# Altium PCB MainControllerPCB.PcbDoc
Units mil, origin at the board's own origin, x right, y up, seen from the top; angles counter-clockwise.
Board outline 6000 x 6000 mil, 4 copper layers (Top Layer, Internal Plane 1, Internal Plane 2, Bottom Layer); 57 components, 84 nets, 327 pads, 42 vias.
Unrouted connection lines stored in the file: 1.
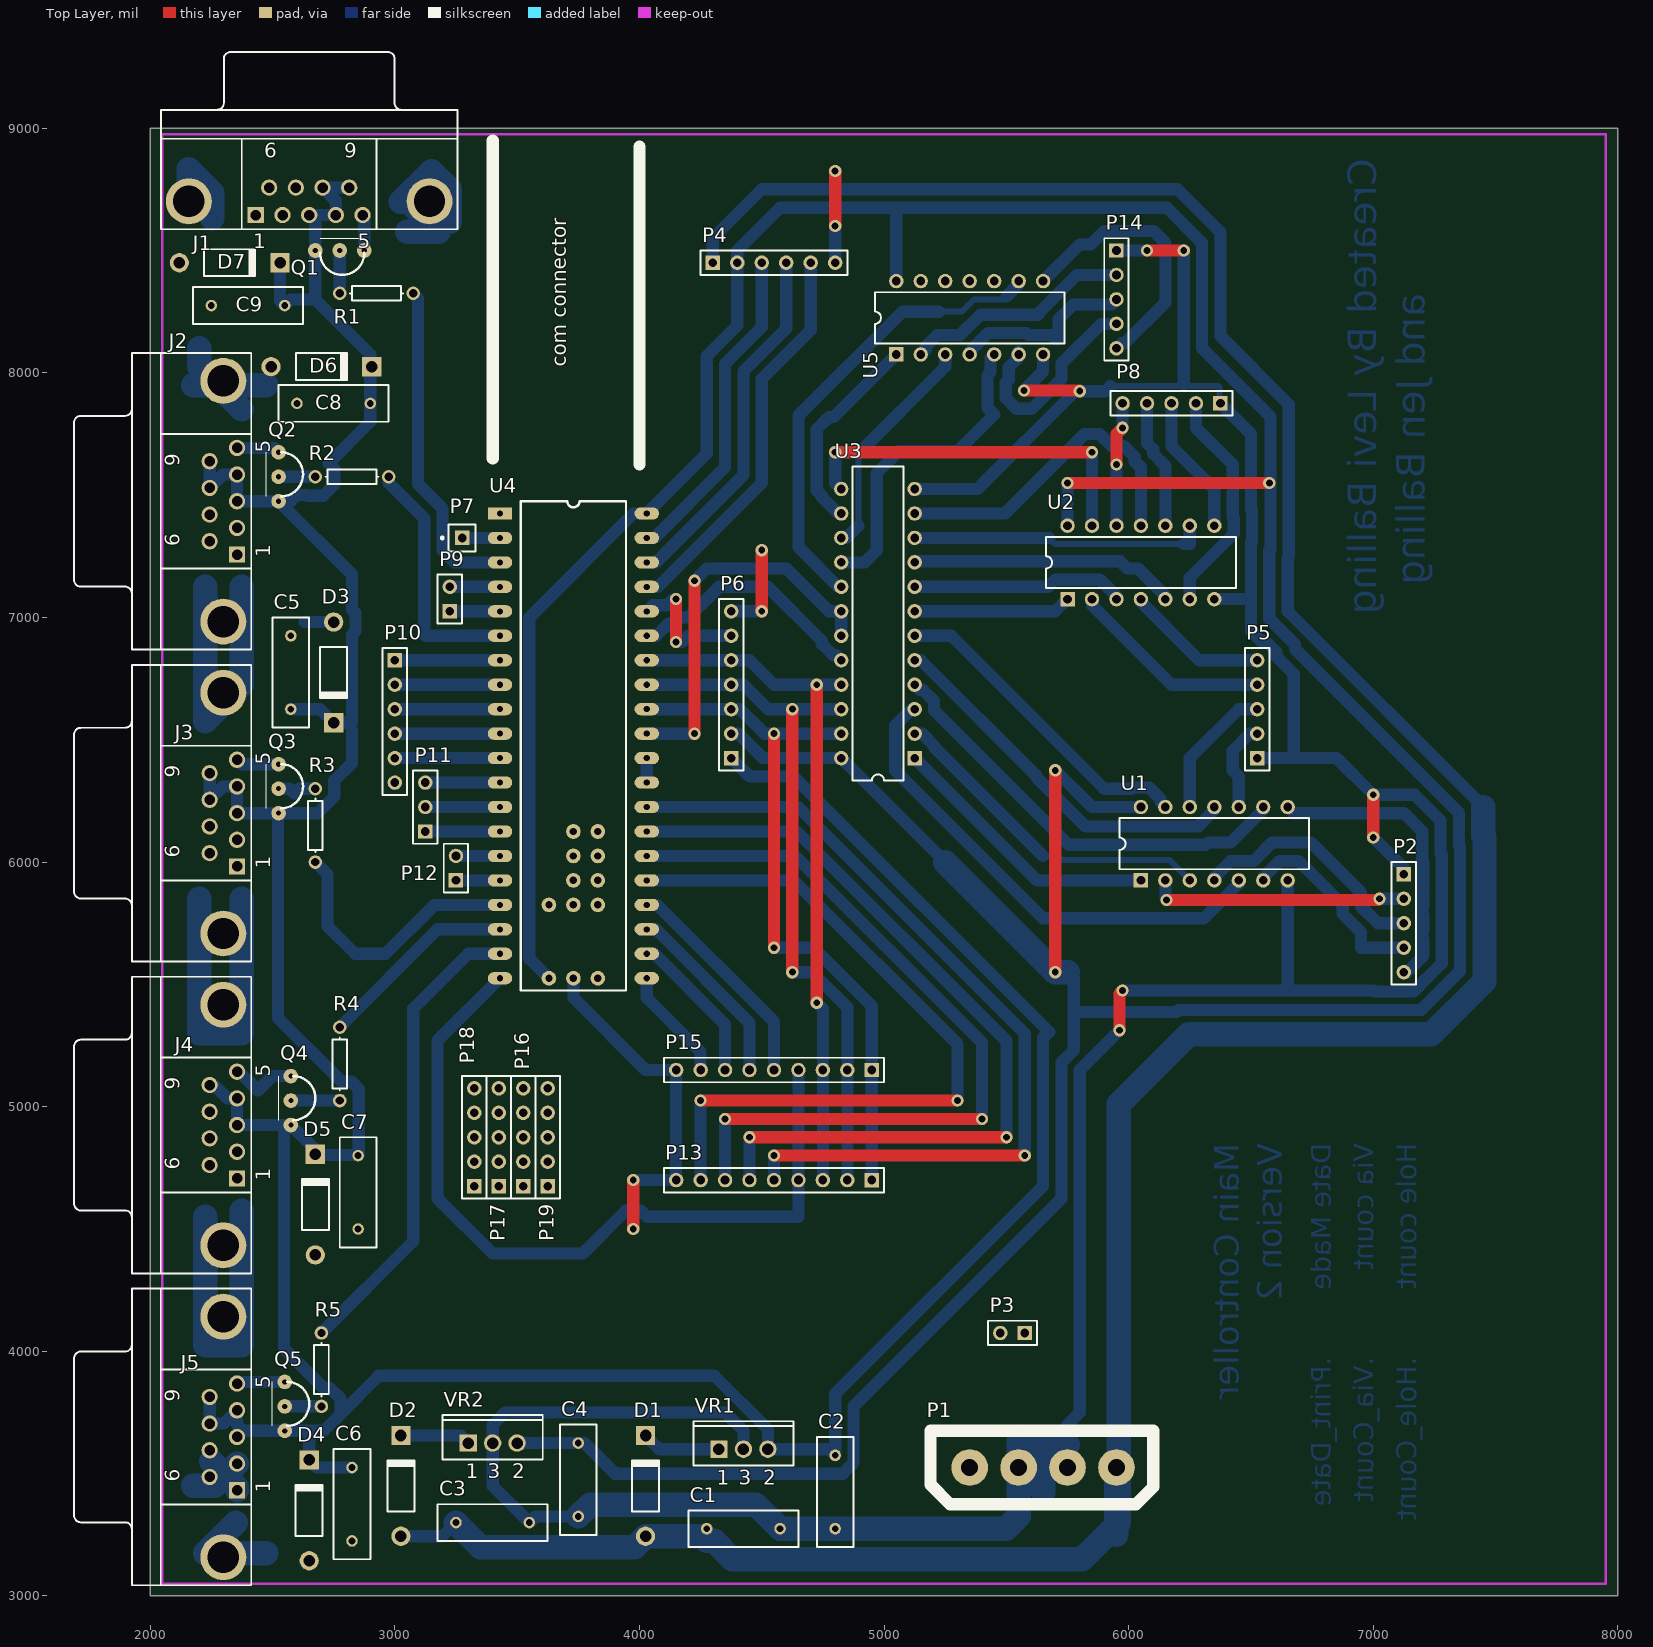
[diagram p0: Top Layer view]
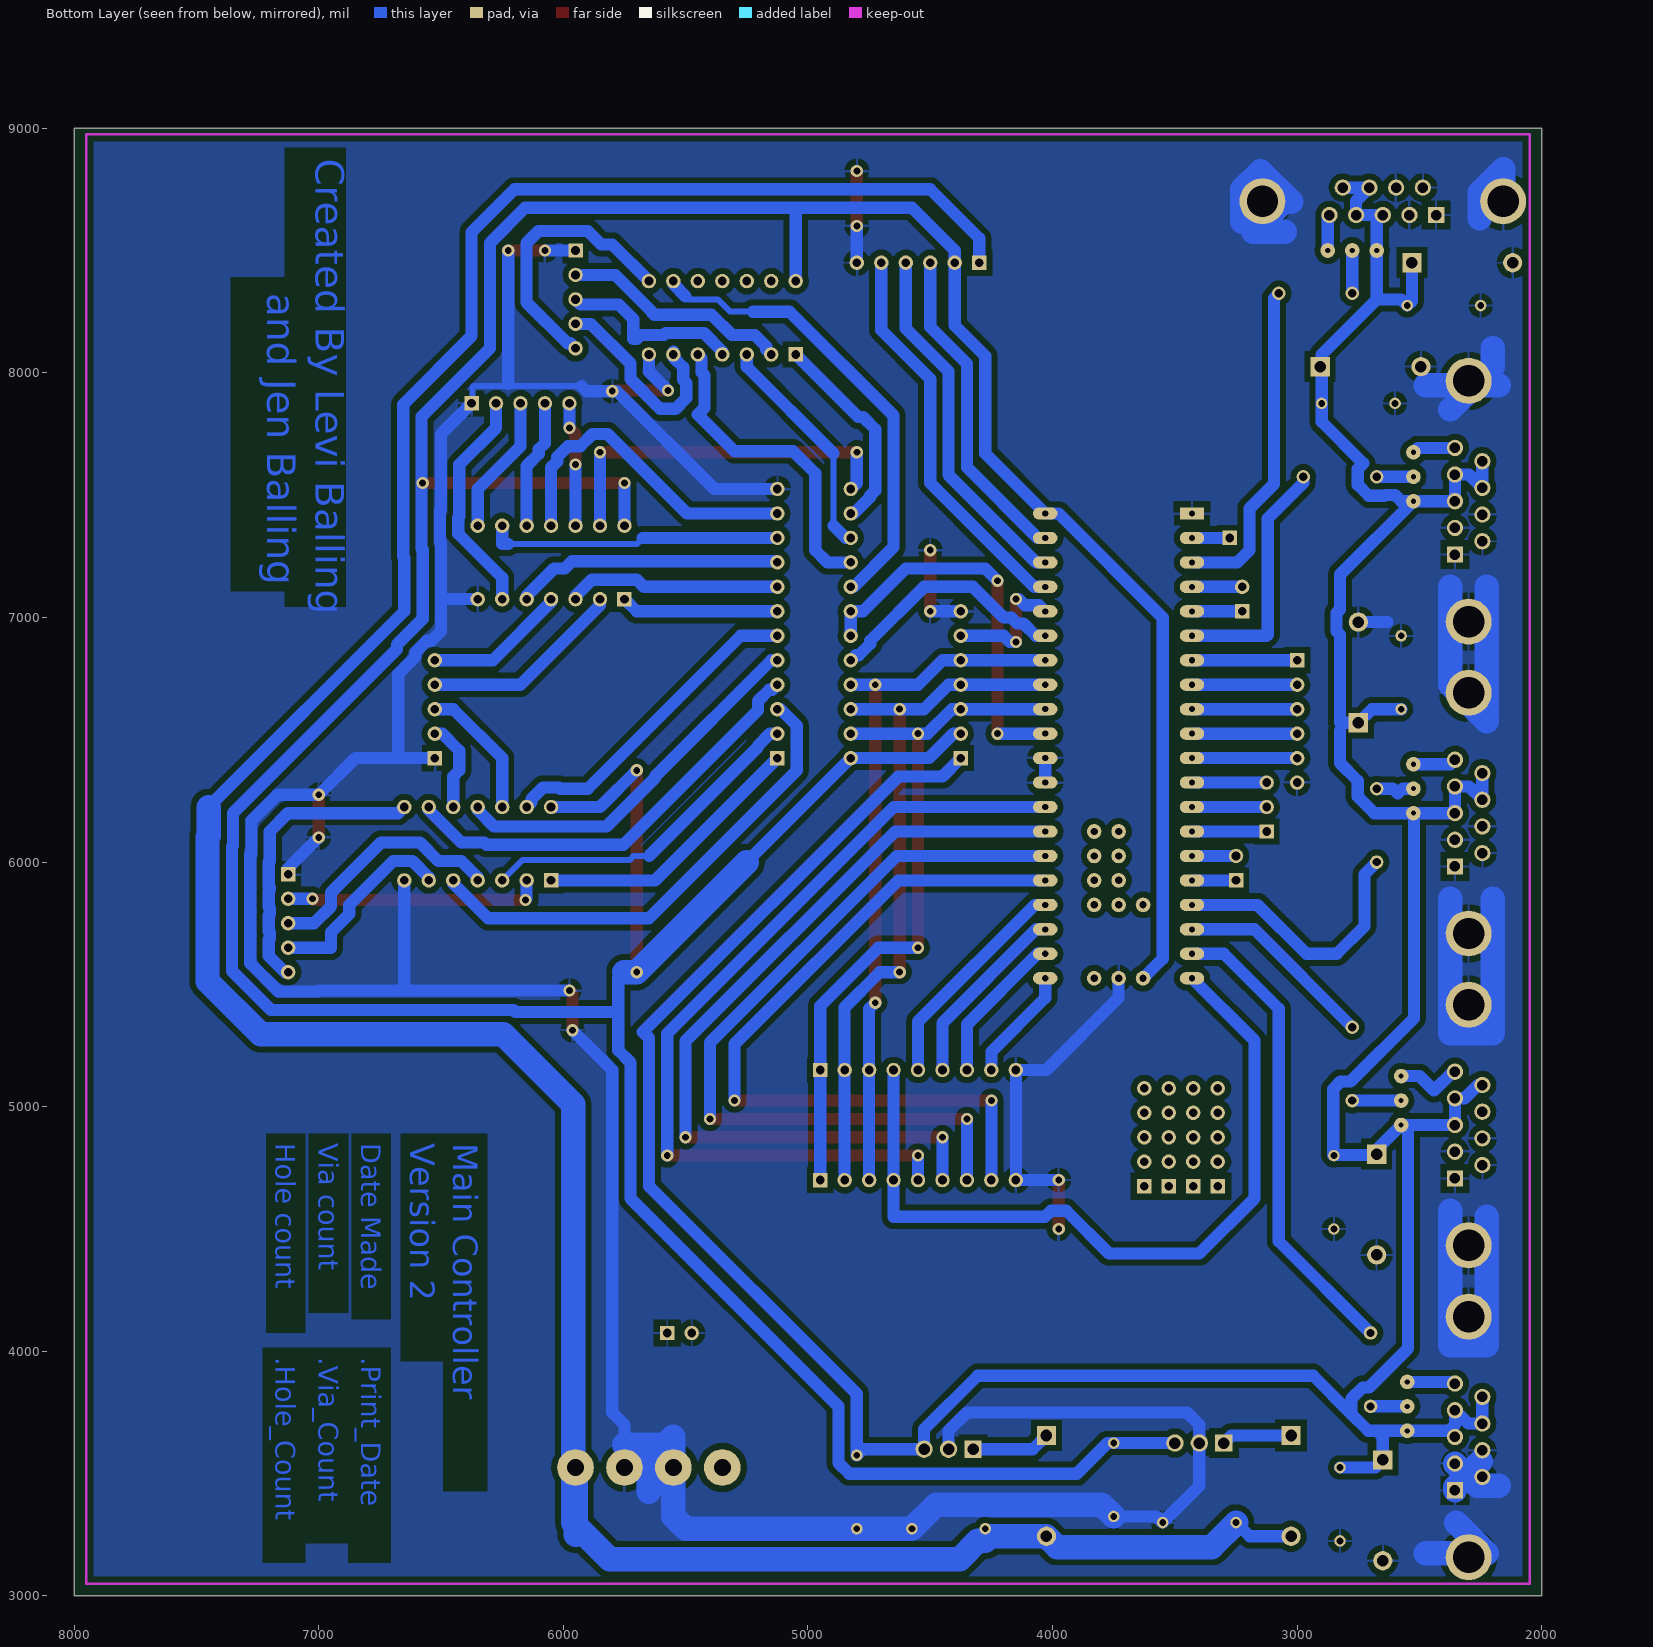
[diagram p1: Bottom Layer view, seen from below]
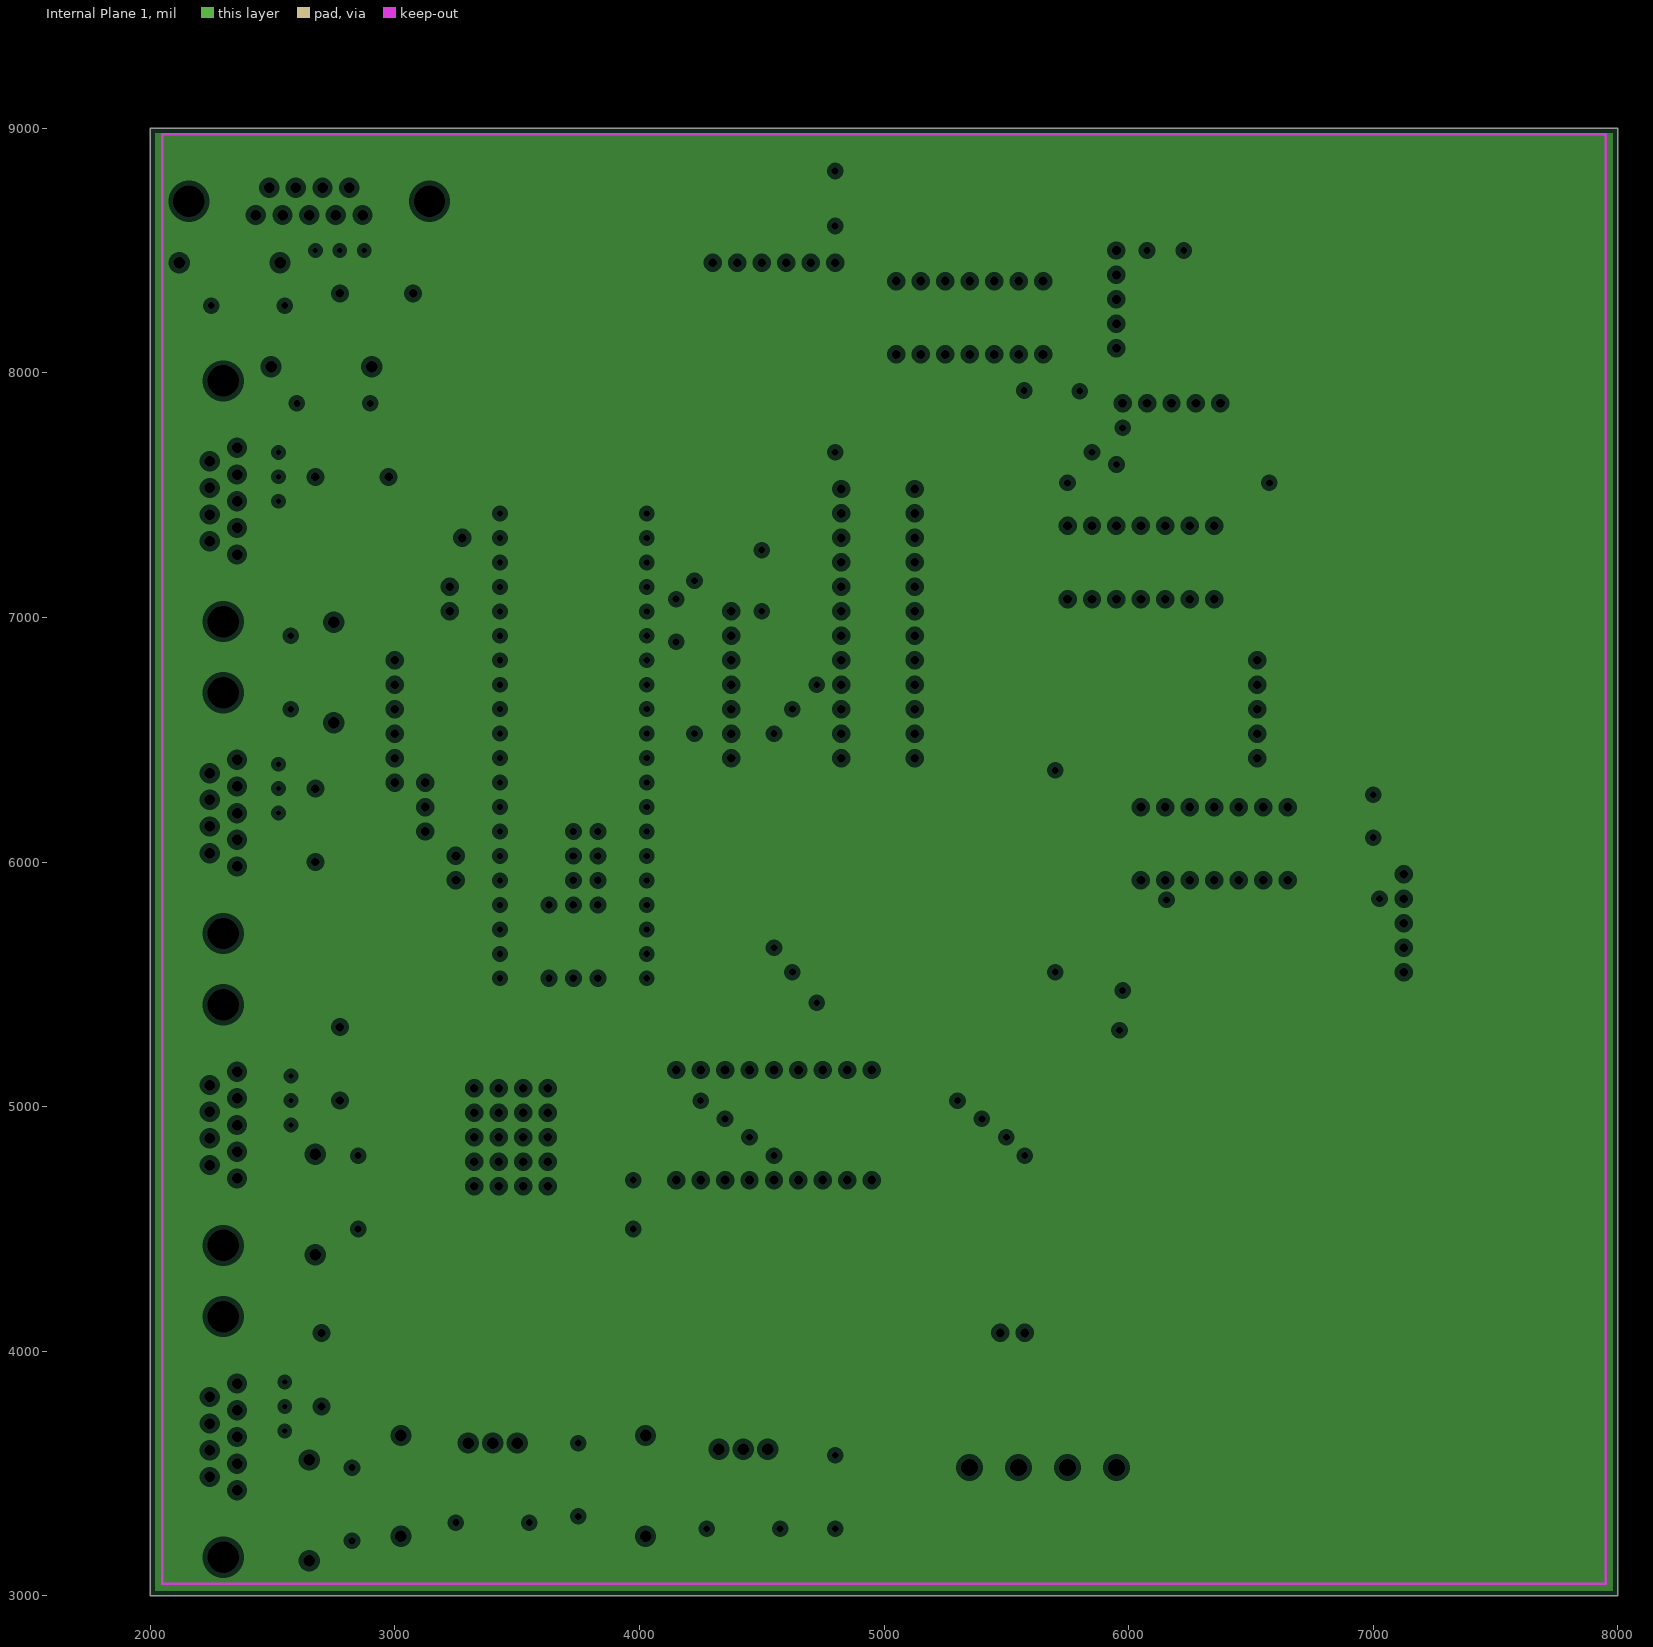
[diagram p2: Internal Plane 1, clearances drawn from the general rule]
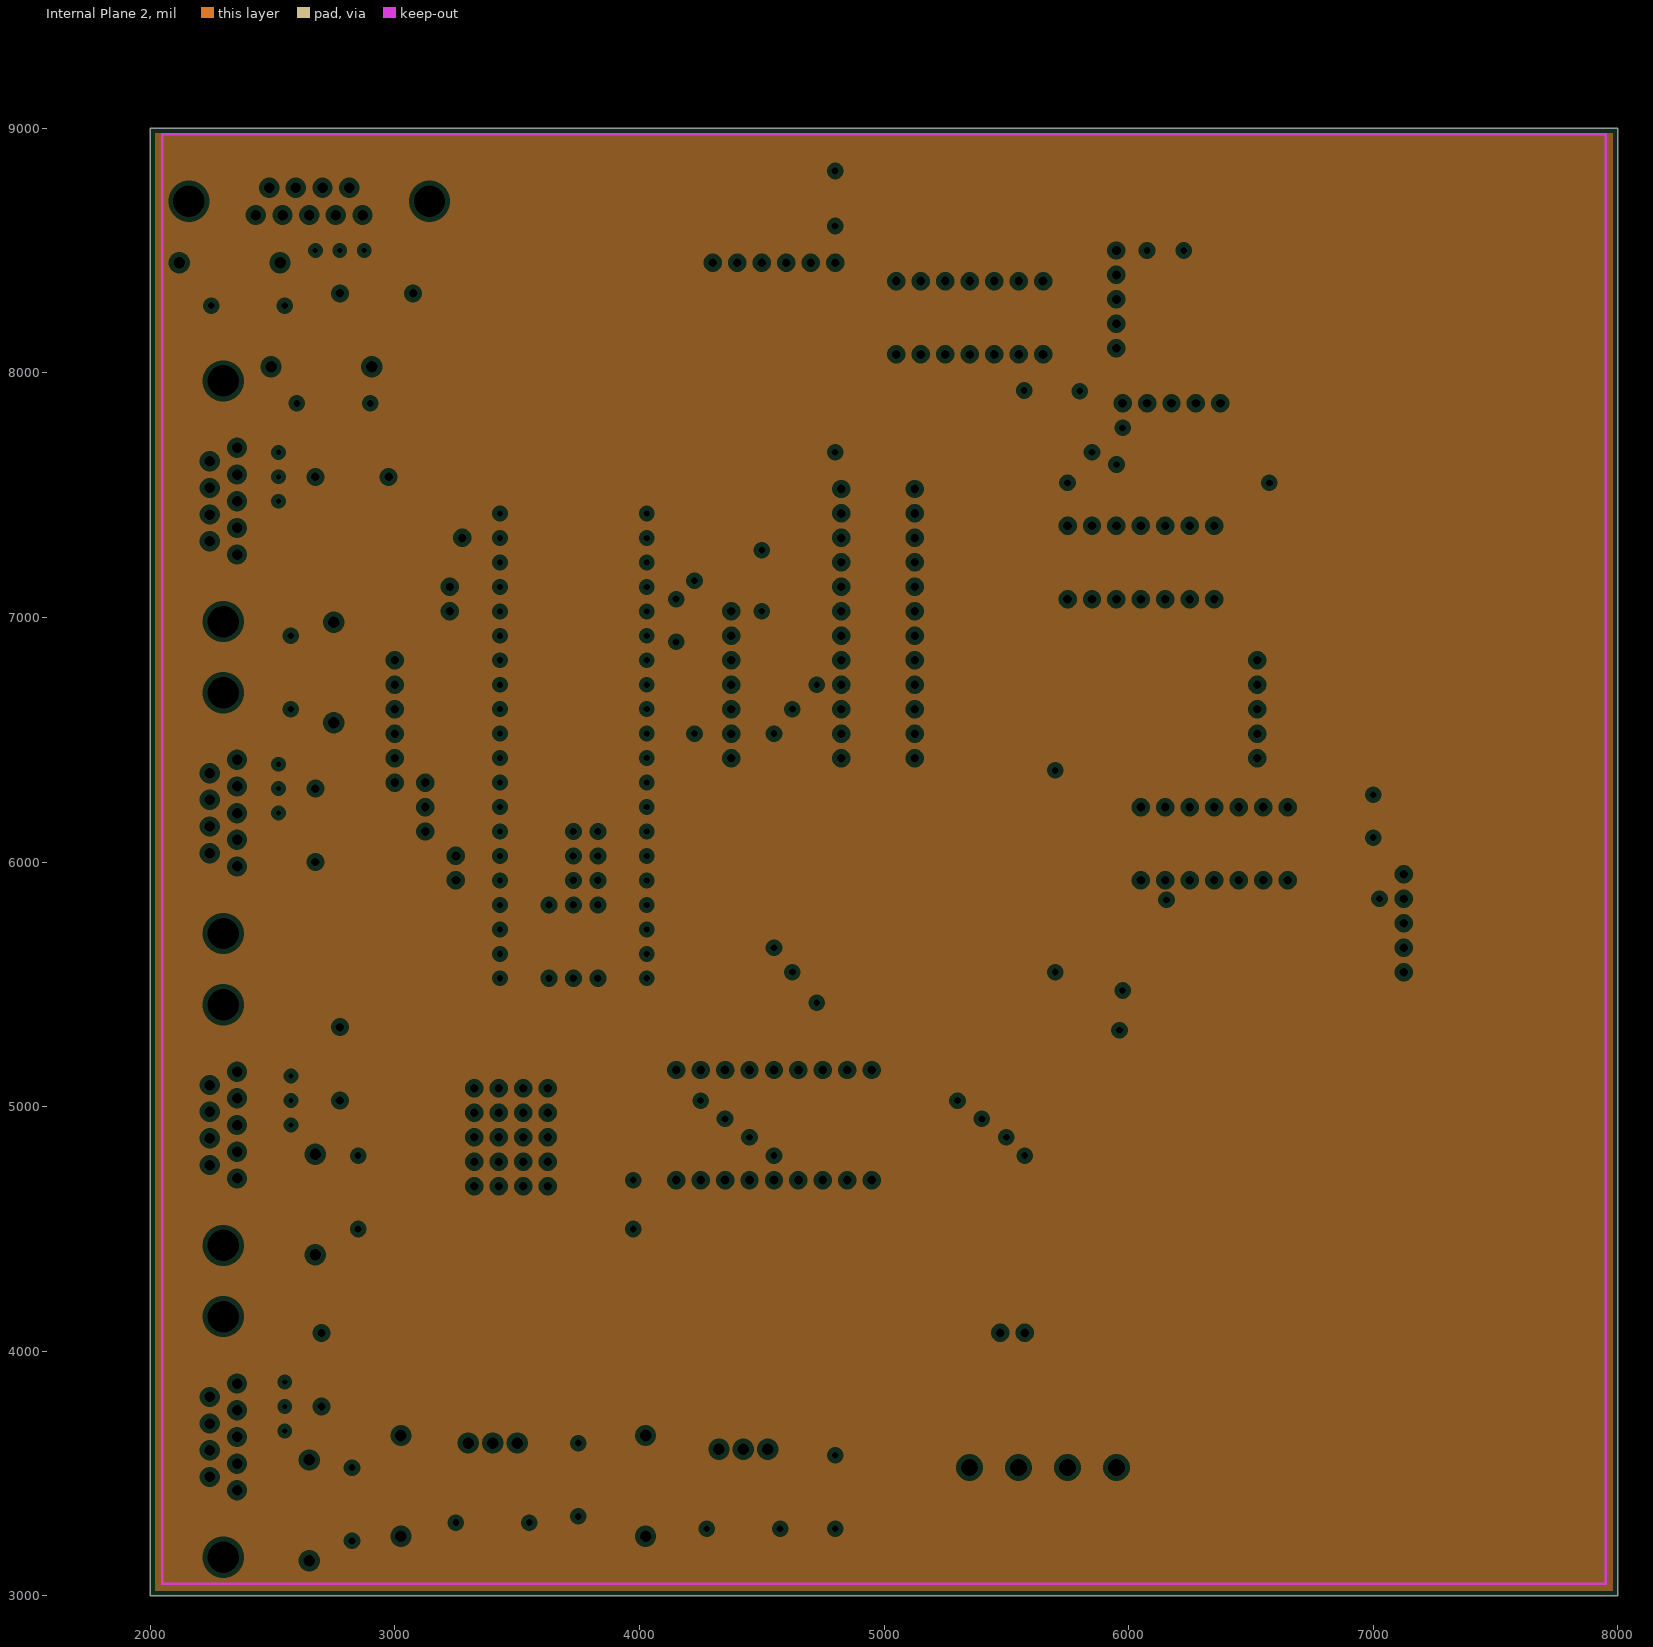
[diagram p3: Internal Plane 2, clearances drawn from the general rule]

## Layer stack, top to bottom
Top Layer: signal copper 1.4
Dielectric: dielectric 12.6, FR-4, Dk 4.8
Internal Plane 1: plane copper 1.4
Dielectric: dielectric 12.6, FR-4, Dk 4.8
Internal Plane 2: plane copper 1.4
Dielectric: dielectric 12.6, FR-4, Dk 4.8
Bottom Layer: signal copper 1.4

## Board outline
2000,3000 8000,3000 8000,9000 2000,9000

## Design rules (kind name [scope] priority, off if disabled: settings)
Clearance [All] p1: gap=25
PlaneClearance [All] p1: clearance=20
PlaneConnect [All] p1: planeconnectstyle=Relief reliefexpansion=20 reliefentries=4 reliefconductorwidth=10 reliefairgap=10
PolygonConnect [All] p1: connectstyle=Relief reliefconductorwidth=10 reliefentries=4 polygonreliefangle="90 Angle"
RoomDefinition MainController [InComponentClass('MainController')] p1: confinementstyle=ConfineIn formatcopy=TRUE lockcomponents=FALSE outline 2050,8975 7950,8975 7950,3050 2050,3050
RoutingVias [All] p1: holewidth=32 width=62 viastyle="Through Hole" minholewidth=28 minwidth=50 maxholewidth=28 maxwidth=50
SilkscreenOverComponentPads [All] p1: minsilkscreentomaskgap=10
SolderMaskExpansion [All] p1: expansion=4
Width [All] p1: maxlimit=100 minlimit=25 preferedwidth=25 minimp=50.000000 maximp=50.000000 favimp=50.000000
25 further rules are at their usual default settings.

## Classes and differential pairs
component class MainController: C1 C2 C3 C4 C5 C6 C7 C8 C9 D1 D2 D3 D4 D5 D6 D7 J1 J2 J3 J4 J5 P1 P2 P3 P5 P6 P7 P8 P10 P12 P13 P14 P15 P16 P17 P18 P19 Q1 Q2 Q3 Q4 Q5 R1 R2 R3 R4 R5 U1 U2 U4 VR1 VR2

## Components (designator, comment, footprint, x,y, rotation, side; value= is the part's Value field where it differs from the comment)
C1 "Cap" RAD-0.3 4425,3275 r0 top
C2 "Cap" RAD-0.3 4800,3425 r270 top
C3 "Cap" RAD-0.3 3400,3300 r0 top
C4 "Cap" RAD-0.3 3750,3475 r270 top
C5 "Cap" RAD-0.3 2575,6775 r270 top
C6 "Cap" RAD-0.3 2825,3375 r90 top
C7 "Cap" RAD-0.3 2850,4650 r90 top
C8 "Cap" RAD-0.3 2750,7875 r0 top
C9 "Cap" RAD-0.3 2400,8275 r0 top
D1 "1N4001" DO-41 4025,3450 r90 top
D2 "1N4001" DO-41 3025,3450 r90 top
D3 "1N4001" DO-41 2750,6775 r270 top
D4 "1N4001" DO-41 2650,3350 r90 top
D5 "1N4001" DO-41 2675,4600 r90 top
D6 "1N4001" DO-41 2700,8025 r0 top
D7 "1N4001" DO-41 2325,8450 r0 top
J1 "D Connector 9" DSUB1.385-2H9 2650,9075 r0 top
J2 "D Connector 9" DSUB1.385-2H9 1925,7475 r90 top
J3 "D Connector 9" DSUB1.385-2H9 1925,6200 r90 top
J4 "D Connector 9" DSUB1.385-2H9 1925,4925 r90 top
J5 "D Connector 9" DSUB1.385-2H9 1925,3650 r90 top
P1 "Header 4" MainPowerConnector 5350,3525 r0 top
P2 "Header 5" HDR1X5 7125,5950 r270 top
P3 "Header 2" HDR1X2 5575,4075 r180 top
P4 "Header 6" HDR1X6 4300,8450 r0 top
P5 "Header 5" HDR1X5 6525,6425 r90 top
P6 "Header 7" HDR1X7 4375,6425 r90 top
P7 "Spare" PIN1 3275,7325 r90 top
P8 "Header 5" HDR1X5 6375,7875 r180 top
P9 "Header 2" HDR1X2 3225,7025 r90 top
P10 "Garage_HVAC" HDR1X6 3000,6825 r270 top
P11 "Header 3" HDR1X3 3125,6125 r90 top
P12 "Header 2" HDR1X2 3250,5925 r90 top
P13 "TempSenseBoard1" HDR1X9 4950,4700 r180 top
P14 "Header 5" HDR1X5 5950,8500 r270 top
P15 "TempSenseBoard1" HDR1X9 4950,5150 r180 top
P16 "Header 5" HDR1X5 3525,4675 r90 top
P17 "Header 5" HDR1X5 3425,4675 r90 top
P18 "Header 5" HDR1X5 3325,4675 r90 top
P19 "Header 5" HDR1X5 3625,4675 r90 top
Q1 "2N3904" 2N3904 2875,8500 r180 top
Q2 "2N3904" 2N3904 2525,7675 r270 top
Q3 "2N3904" 2N3904 2525,6400 r270 top
Q4 "2N3904" 2N3904 2575,5125 r270 top
Q5 "2N3904" 2N3904 2550,3875 r270 top
R1 "Res1" AXIAL-0.3 2925,8325 r0 top
R2 "Res1" AXIAL-0.3 2825,7575 r0 top
R3 "Res1" AXIAL-0.3 2675,6150 r270 top
R4 "Res1" AXIAL-0.3 2775,5175 r90 top
R5 "Res1" AXIAL-0.3 2700,3925 r90 top
U1 "SN7416N" N014 6350,6075 r0 top
U2 "SN7416N" N014 6050,7225 r0 top
U3 "SN74HC154NT" NT024D 4975,6975 r90 top
U4 "Teensy2.0++" Teensy2.0++ 3430,7425 r0 top
U5 "SN7416N" N014 5350,8225 r0 top
VR1 "L7812CP" ISOWATT220AB 4425,3600 r0 top
VR2 "L7805CP" ISOWATT220AB 3400,3625 r0 top

## Footprints (in the part's own frame and the unit in brackets; to place one, negate y for a bottom-side part, rotate by r counter-clockwise, add the part's x,y. Pads: shape width x height; smd on the part's side, far side on the other; paste and mask are expansions set on the pad)
2N3904 [mil] "simple transistor, but bigger holes and pads"
  round 60 hole 21: 1(0,0) 2(100,0) 3(200,0)
  silkscreen extent 0,-50 180,100
AXIAL-0.3 [mm] "Axial Device, Thru-Hole; 2 Leads; 0.3 in Pin Spacing"
  round 1.4 hole 0.85: 1(-3.81,0) 2(3.81,0)
  silkscreen extent -2.77,-0.76 2.77,0.76
DO-41 [mm] "Diode, Axial; Body 5.2 x 2.7 mm (LxDia. max), Lead Dia. 0.86 mm (max)"
  round 2 hole 1.2: 1(-5.23,0)
  rect 2x2 hole 1.2: 2(5.23,0)
  silkscreen extent -2.65,-1.4 2.75,1.4
DSUB1.385-2H9 [mm] "Connector; D Subminiature; 9 Position; Right Angle; Pitch 1.385 mm"
  rect 1.69x1.69 hole 1.09: 1(-5.54,-10.92)
  round 1.69 hole 1.09: 2(-2.77,-10.92) 3(0,-10.92) 4(2.77,-10.92) 5(5.54,-10.92) 6(-4.155,-8.08) 7(-1.385,-8.08) 8(1.385,-8.08) 9(4.155,-8.08)
  round 4.76 hole 3.26: 10(-12.495,-9.5) 11(12.495,-9.5)
  silkscreen extent -15.4,-12.4 15.4,6
HDR1X2 [mm] "Connector; Header; 2 Position"
  rect 1.5x1.5 hole 0.9: 1(0,0)
  round 1.5 hole 0.9: 2(2.54,0)
  silkscreen extent -1.27,-1.27 3.81,1.27
HDR1X3 [mm] "Connector; Header; 3 Position"
  rect 1.5x1.5 hole 0.9: 1(0,0)
  round 1.5 hole 0.9: 2(2.54,0) 3(5.08,0)
  silkscreen extent -1.27,-1.27 6.35,1.27
HDR1X5 [mm] "Connector; Header; 5 Position"
  rect 1.5x1.5 hole 0.9: 1(0,0)
  round 1.5 hole 0.9: 2(2.54,0) 3(5.08,0) 4(7.62,0) 5(10.16,0)
  silkscreen extent -1.27,-1.27 11.43,1.27
HDR1X6 [mm] "Connector; Header; 6 Position"
  rect 1.5x1.5 hole 0.9: 1(0,0)
  round 1.5 hole 0.9: 2(2.54,0) 3(5.08,0) 4(7.62,0) 5(10.16,0) 6(12.7,0)
  silkscreen extent -1.27,-1.27 13.97,1.27
HDR1X7 [mm] "Connector; Header; 7 Position"
  rect 1.5x1.5 hole 0.9: 1(0,0)
  round 1.5 hole 0.9: 2(2.54,0) 3(5.08,0) 4(7.62,0) 5(10.16,0) 6(12.7,0) 7(15.24,0)
  silkscreen extent -1.27,-1.27 16.51,1.27
HDR1X9 [mm] "Connector; Header; 9 Position"
  rect 1.5x1.5 hole 0.9: 1(0,0)
  round 1.5 hole 0.9: 2(2.54,0) 3(5.08,0) 4(7.62,0) 5(10.16,0) 6(12.7,0) 7(15.24,0) 8(17.78,0) 9(20.32,0)
  silkscreen extent -1.27,-1.27 21.59,1.27
ISOWATT220AB [mm] "TO, Thru-Hole, Vertical, Heatsink Mounted; 3 In-Line Leads; Pitch 2.54 mm; Pin sequence 1, 3, 2"
  rect 1.8x1.8 hole 1.2: 1(-2.54,0)
  round 1.8 hole 1.2: 2(2.54,0) 3(0,0)
  silkscreen extent -5.2,-1.7 5.2,2.9
MainPowerConnector [mil]
  round 150 hole 70: 1(0,0) 2(200,0) 3(400,0) 4(600,0)
  silkscreen extent -160,-150 750,150
N014 [mm] "DIP; 14 Leads; Row Spacing 7.62 mm; Pitch 2.54 mm"
  rect 1.5x1.5 hole 0.9: 1(-7.62,-3.81)
  round 1.5 hole 0.9: 2(-5.08,-3.81) 3(-2.54,-3.81) 4(0,-3.81) 5(2.54,-3.81) 6(5.08,-3.81) 7(7.62,-3.81) 8(7.62,3.81) 9(5.08,3.81) 10(2.54,3.81) 11(0,3.81) 12(-2.54,3.81) 13(-5.08,3.81) 14(-7.62,3.81)
  silkscreen extent -9.85,-2.65 9.85,2.65
NT024D [mm] "DIP; 24 Leads; Row Spacing 7.62 mm; Pitch 2.54 mm"
  rect 1.5x1.5 hole 0.9: 1(-13.97,-3.81)
  round 1.5 hole 0.9: 2(-11.43,-3.81) 3(-8.89,-3.81) 4(-6.35,-3.81) 5(-3.81,-3.81) 6(-1.27,-3.81) 7(1.27,-3.81) 8(3.81,-3.81) 9(6.35,-3.81) 10(8.89,-3.81) 11(11.43,-3.81) 12(13.97,-3.81) 13(13.97,3.81) 14(11.43,3.81) 15(8.89,3.81) 16(6.35,3.81) 17(3.81,3.81) 18(1.27,3.81) 19(-1.27,3.81) 20(-3.81,3.81) 21(-6.35,3.81) 22(-8.89,3.81) 23(-11.43,3.81) 24(-13.97,3.81)
  silkscreen extent -16.3,-2.65 16.3,2.65
PIN1 [mm] "Connector; Plug"
  rect 1.5x1.5 hole 0.9: 1(0,0)
  silkscreen extent -1.4,-1.4 1.4,2.17
RAD-0.3 [mm] "Radial Cap, Thru-Hole; 2 Leads; 0.3 in Pin Spacing"
  round 1.2 hole 0.7: 1(-3.81,0) 2(3.81,0)
  silkscreen extent -5.71,-1.91 5.71,1.91
Teensy2.0++ [mil]
  rect 100x50 hole 25: 1(0,0)
  oval 100x50 hole 25: 2(0,-100) 3(0,-200) 4(0,-300) 5(0,-400) 6(0,-500) 7(0,-600) 8(0,-700) 9(0,-800) 10(0,-900) 11(0,-1000) 12(0,-1100) 13(0,-1200) 14(0,-1300) 15(0,-1400) 16(0,-1500) 17(0,-1600) 18(0,-1700) 19(0,-1800) 20(0,-1900) 21(600,0) 22(600,-100) 23(600,-200) 24(600,-300) 25(600,-400) 26(600,-500) 27(600,-600) 28(600,-700) 29(600,-800) 30(600,-900) 31(600,-1000) 32(600,-1100) 33(600,-1200) 34(600,-1300) 35(600,-1400) 36(600,-1500) 37(600,-1600) 38(600,-1700) 39(600,-1800) 40(600,-1900)
  round 60 hole 30: 41(200,-1900) 42(300,-1900) 43(400,-1900) 44(400,-1300) 45(400,-1400) 46(400,-1500) 47(400,-1600) 48(300,-1300) 49(300,-1400) 50(300,-1500) 51(300,-1600) 52(200,-1600)
  silkscreen extent 85,-1950 515,50

## Part data
C1 C2 C3 C4 C5 C6 C7 C8 C9: "Capacitor"
D1 D2: library part "Diode 1N4001", "1 Amp General Purpose Rectifier"
D3 D4 D5 D6 D7: "1.0 Ampere General Purpose Rectifier"
J1 J2 J3 J4 J5: "Receptacle Assembly, 9 Position, Right Angle"
P1: "Header, 4-Pin"
P2 P5 P8 P14 P16 P17 P18 P19: "Header, 5-Pin"
P3 P9 P12: "Header, 2-Pin"
P4: "Header, 6-Pin"
P6: "Header, 7-Pin"
P7: library part Plug, "Plug"
P10: library part "Header 6", "Header, 6-Pin"
P11: "Header, 3-Pin"
P13 P15: library part "Header 9", "Header, 9-Pin"
Q1 Q2 Q3 Q4 Q5: "NPN General Purpose Amplifier"
R1 R2 R3 R4 R5: "Resistor"
U1 U2 U5: "Hex Inverter Buffer / Driver with High-Voltage Outputs"
U3: "4-Line to 16-Line Decoder / Demultiplexer"
U4: "The teensy 2.0 from www.PJRC.com"
VR1: library part L7805CP, "Positive Voltage Regulator"
VR2: "Positive Voltage Regulator"

## Via types
v1: diameter 50, hole 28, Top Layer to Bottom Layer, 42 vias

## Nets (pads, with @x,y where several pads share a name; then routed paths per layer and width w, separated by ;. In a path a pad name is that pad's centre, name@x,y a point inside that pad or via, vN(x,y) a via of type N, cw(c..) or ccw(c..) an arc to the next point about the centre after c; other vN are vias at no path point)
16DEMUX_ENABLE: U3.18 U3.19 U4.30 | length 1613.2
  Top Layer w50: v1(4225,6525) v1(4225,7150)
  Bottom Layer w50: U4.30 v1(4225,6525) ; v1(4225,7150) 4275,7200 4600,7200 4775,7025 U3.18 U3.19
+12V: C2.1 C5.2 C6.2 C7.2 C8.2 C9.2 D3.2 D4.2 D5.2 D6.2 D7.2 J1.3 J1.4 J1.8 J1.9 J2.3 J2.4 J2.8 J2.9 J3.3 J3.4 J3.8 J3.9 J4.3 J4.4 J4.8 J4.9 J5.3 J5.4 J5.8 J5.9 P6.1 Q1.3 Q2.3 Q3.3 Q4.3 Q5.3 VR1.2 | length 15992.3
  Bottom Layer w50: J5.9 J5.8 2300.39,3704.53 J5.4 2354.92,3700 2379.92,3675 Q5.3 2675,3675 ; J4.9 2261.42,5088.58 2315.95,5034.05 J4.4 J4.3 Q4.3 ; J3.9 J3.8 2297.64,6309.05 J3.4 J3.3 Q3.3 ; J2.9 J2.8 2297.64,7584.06 J2.4 J2.3 Q2.3 ; D7.2 2530.91,8294.09 C9.2 2575,8300 2675,8300 ; C5.2 2694.09,6625 D3.2 2825,6569.09 2825,6929.52 2839.37,6943.89 2839.37,7017.92 2825,7032.29 2825,7175 Q2.3 ; J1.9 J1.8 2759.05,8702.36 J1.4 J1.3 2675,8620.08 Q1.3 2675,8300 ; C6.2 2680.91,3525 D4.2 2650,3650 2675,3675 ; 2825,6538.19 2825,6404.57 2752.56,6332.13 2752.56,6267.87 2684.69,6200 Q3.3 ; P6.1 4450,6350 4630.33,6350 5675,5305.33 5650,5280.33 5650,4675 4800,3825 C2.1 4775,3600 VR1.2 4525,3681.07 4306.07,3900 2934.69,3900 2777.56,3742.87 ; Q3.3 2522.44,6197.44 2522.44,5361.81 2781.69,5102.56 2822.44,5102.56 2852.56,5072.44 2852.56,4802.56 2697.44,4802.56 Q4.3 ; Q2.3 2575,7475 2600,7500 2640.31,7500 2642.87,7497.44 2707.13,7497.44 2752.56,7542.87 2752.56,7607.13 2729.84,7629.84 2900,7800 2900,8075 2675,8300 ; Q4.3 2547.44,4897.44 2547.44,4011.81 2706.69,3852.56 2732.13,3852.56 2777.56,3807.13 2777.56,3742.87 ; 2675,3675 2709.69,3675 2777.56,3742.87
+24V: C1.1 C3.1 D1.1 D2.1 P1.4 P4.1 | length 12649.8
  Bottom Layer w50: D2.1 3194.09,3244.09 C3.1 ; P4.1 4300,8550 4500,8750 6200,8750 6375,8575 6375,8150 6654.53,7870.47 6654.53,7248.86 6650,7244.33 6650,7025 7450,6225
  Bottom Layer w100: C3.1 3350,3200 3980.91,3200 D1.1 4255.91,3244.09 4275,3225 4305,3225 4380,3150 5810,3150 5960,3300 5960,5010 6245.47,5295.47 7236.49,5295.47 7454.53,5513.51 7454.53,6103.79 7450,6108.32 7450,6225 ; 5950,3250 P1.4
ANALOG_IN_1: P13.5 U4.33 | length 3552.7
  Top Layer w50: v1(4550,4800) 5400,4800 v1(5575,4800)
  Bottom Layer w50: U4.33 4649.26,6225 5575,5299.26 v1(5575,4800) ; P13.5 v1(4550,4800)
ANALOG_IN_2: P13.6 U4.34 | length 3443.1
  Top Layer w50: v1(4450,4875) v1(5500,4875)
  Bottom Layer w50: U4.34 4643.2,6125 5500,5268.2 v1(5500,4875) ; P13.6 v1(4450,4875)
ANALOG_IN_3: P13.7 U4.35 | length 3298.1
  Top Layer w50: v1(4350,4950) v1(5400,4950)
  Bottom Layer w50: U4.35 4637.13,6025 5400,5262.13 v1(5400,4950) ; P13.7 v1(4350,4950)
ANALOG_IN_4: P13.8 U4.36 | length 3153.1
  Top Layer w50: v1(4250,5025) v1(5300,5025)
  Bottom Layer w50: U4.36 4631.07,5925 5300,5256.07 v1(5300,5025) ; P13.8 v1(4250,5025)
ANALOG_IN_5: P15.5 U4.37 | length 915.7
  Bottom Layer w50: U4.37 4073.2,5825 4550,5348.2 P15.5
ANALOG_IN_6: P15.6 U4.38 | length 770.7
  Bottom Layer w50: U4.38 4067.13,5725 4450,5342.13 P15.6
ANALOG_IN_7: P15.7 U4.39 | length 625.7
  Bottom Layer w50: U4.39 4061.07,5625 4350,5336.07 P15.7
ANALOG_IN_8: P15.8 U4.40 | length 466.1
  Bottom Layer w50: U4.40 4030,5445 4250,5225 P15.8
BUTTONCLOSEBUS: P9.2 U4.4 | length 205
  Bottom Layer w50: P9.2 U4.4
BUTTONOPENBUS: P9.1 U4.5 | length 205
  Bottom Layer w50: P9.1 U4.5
DEMUX_A: P6.3 P13.1 P15.1 U3.23 U4.29 | length 2922.1
  Top Layer w50: v1(4550,5650) v1(4550,6525)
  Bottom Layer w50: U4.29 4410.83,6625 4510.83,6525 v1(4550,6525) U3.23 ; v1(4550,5650) 4712.13,5650 4950,5412.13 P15.1 P13.1
DEMUX_B: P6.4 P13.2 P15.2 U3.22 U4.28 | length 2902.1
  Top Layer w50: v1(4625,5550) v1(4625,6625)
  Bottom Layer w50: U4.28 4425,6725 4525,6625 v1(4625,6625) U3.22 ; v1(4625,5550) 4706.07,5550 4850,5406.07 P15.2 P13.2
DEMUX_C: P6.5 P13.3 P15.3 U3.21 U4.27 | length 2871.8
  Top Layer w50: v1(4725,5425) v1(4725,6725)
  Bottom Layer w50: U4.27 4450,6825 4550,6725 v1(4725,6725) U3.21 ; v1(4725,5425) 4750,5400 P15.3 P13.3
DEMUX_D: U3.20 U4.26 | length 1009.4
  Bottom Layer w50: U4.26 4068.93,6925 4118.93,6975 4143.93,6975 4168.93,7000 4200,7000 4325,7125 4525,7125 4745.47,6904.53 4745.47,6892.06 4792.06,6845.47 4804.53,6845.47 U3.20
DIRECTION1: P4.3 U4.22 | length 1337.9
  Bottom Layer w50: U4.22 4061.07,7325 4350,7613.93 4350,8037.13 4500,8187.13 P4.3
DIRECTION2: P4.4 U4.23 | length 1482.9
  Bottom Layer w50: U4.23 4067.13,7225 4425,7582.87 4425,8006.07 4600,8181.07 P4.4
FAN1: J1.5 Q1.1 | length 138.2
  Bottom Layer w50: Q1.1 J1.5@2875,8638.19
FAN2: J2.5 Q2.1 | length 152
  Bottom Layer w50: J2.5 Q2.1@2506.89,7693.11
FAN3: J3.5 Q3.1 | length 152
  Bottom Layer w50: J3.5@2373.03,6400 Q3.1
FAN4: J4.5 Q4.1 | length 276.5
  Bottom Layer w50: J4.5 2363.62,5143.11 2440.73,5066 2499.73,5125 Q4.1
FAN5: J5.5 Q5.1 | length 188.2
  Bottom Layer w50: J5.5@2361.81,3875 Q5.1
G_TRIGGER: P11.1 U4.14 | length 305
  Bottom Layer w50: P11.1 U4.14
GARAGE_SWITCH: P10.1 U4.7 | length 430
  Bottom Layer w50: P10.1 U4.7
GND: C1.2 C2.2 C3.2 C4.2 C5.1 C6.1 C7.1 C8.1 C9.1 D3.1 D4.1 D5.1 D6.1 D7.1 J1.1 J1.2 J1.6 J1.7 J1.10 J1.11 J2.1 J2.2 J2.6 J2.7 J2.10 J2.11 J3.1 J3.2 J3.6 J3.7 J3.10 J3.11 J4.1 J4.2 J4.6 J4.7 J4.10 J4.11 J5.1 J5.2 J5.6 J5.7 J5.10 J5.11 P1.2 P1.3 P2.1 P3.1 P3.2 P4.6 P5.1 P6.7 P8.1 P10.6 P13.9 P14.1 P15.9 U1.7 U2.7 U3.12 U4.1 U4.31 U4.32 U4.42 U5.7 VR1.3 VR2.3 | length 23207.2
  Top Layer w50: v1(3975,4500) v1(3975,4700) ; v1(4500,7025) v1(4500,7275) ; v1(4800,8600) v1(4800,8825) ; v1(5572.34,7927.66) v1@5800,7927.66 ; v1(5962.5,5312.5) 5962.5,5462.5 v1(5975,5475) ; v1(6075,8500) v1(6225,8500) ; v1(7000,6100) v1(7000,6275)
  Bottom Layer w25: 5925,7945.47 6366.14,7945.47 6370.47,7941.14 P8.1@6370.47,7879.53
  Bottom Layer w50: 2630.91,6980.91 D3.1 ; U4.42 3730,5445 4025,5150 P15.9 P13.9 v1(3975,4700) ; C4.2 3575,3325 C3.2 3400,3450 VR2.3 3400,3700 3450,3750 4350,3750 4425,3675 VR1.3 ; U4.32 U4.31 ; P6.7 v1(4500,7025) ; P4.6 v1(4800,8600) ; U3.12 5381.8,7525 5781.8,7925 5904.53,7925 5925,7945.47 ; v1(5572.34,7927.66) 5650,8005.33 U5.7 ; 5750,3617.84 5750,3700 5800,3750 5800,5150 v1(5962.5,5312.5) ; P14.1 v1(6075,8500) ; v1(5975,5475) 6650,5475 ; 6225,7954.53 v1(6225,8500) ; U2.7 6500,7075 ; P8.1 6500,7750 6500,7443.53 6504.53,7439.01 6504.53,7310.99 6500,7306.47 6500,7075 ; P5.1 6675,6425 ; U1.7 6650,5475 ; v1(7000,6100) 7125,5975 P2.1 ; 6500,7075 6500,6943.93 6539.41,6904.53 6557.94,6904.53 6604.53,6857.94 6604.53,6839.41 6675,6768.93 6675,6425 ; 6650,5475 7000,5475 7004.53,5470.47 7164.01,5470.47 7279.53,5585.99 7279.53,6031.3 7275,6035.83 7275,6168.93 7168.93,6275 v1(7000,6275) 6850,6425 6675,6425
  Bottom Layer w100: J1.10 2158.07,8833.07 2254.4,8736.74 2254.4,8631 ; 2175,3450 2263.98,3450 J5.2 ; 2175,7950 J2.11@2275,7950 ; 2200,5850 2200,5300 2375,5300 2375,5850 ; 2200,8100 2200,8025 J2.11@2275,7950 ; 2225,4550 2225,4025 2375,4025 2375,4575 ; 2225,7125 2225,6575 2375,6725 2375,7125 ; 2250,3550 2306.99,3493.01 2354.92,3445.08 J5.1 ; 2350,3300 2225,3175 2475,3175 ; 2375,7850 J2.11@2275,7950 ; 2475,7950 J2.11@2275,7950 ; 3050,8577.56 3179.61,8577.56 3057.17,8700 3025,8700 3150,8825 3225,8750 3225,8617.91 J1.11 ; C4.2 3798.62,3373.62 4425,3373.62 4476.38,3373.62 C1.2 C2.2 5500,3275 5550,3325 P1.2 5550,3650 5582.16,3617.84 5650,3617.84 ; 5650,3425 5650,3617.84 ; 5750,3617.84 5650,3617.84
  other v1: 5800,7925
NetD1_2: D1.2 VR1.1 | length 323.2
  Bottom Layer w50: D1.2 4080.91,3600 VR1.1
NetD2_2: D2.2 VR2.1 | length 287.8
  Bottom Layer w50: D2.2 3269.09,3655.91 VR2.1
NetP2_2: P2.2 U1.2 | length 1047.3
  Top Layer w50: v1(6154.53,5845.47) 7020.47,5845.47 v1(7025,5850)
  Bottom Layer w50: v1@6150,5850 U1.2 ; v1(7025,5850) P2.2
NetP2_3: P2.3 U1.4 | length 1015.6
  Bottom Layer w50: U1.4 6350,5937.47 6417.06,6004.53 6510.99,6004.53 6585.99,6079.53 6745.47,6079.53 6950,5875 6950,5818.93 7018.93,5750 P2.3
NetP2_4: P2.4 U1.6 | length 820.7
  Bottom Layer w50: U1.6 6550,5937.47 6617.06,6004.53 6695.47,6004.53 6875,5825 6875,5787.87 6950,5712.87 6950,5650 P2.4
NetP2_5: P2.5 U1.8 | length 1219.8
  Bottom Layer w50: U1.8 6675,6200 7125,6200 7200,6125 7200,6004.77 7204.53,6000.24 7204.53,5899.76 7200,5895.23 7200,5887.47 7204.53,5882.94 7204.53,5817.06 7200,5812.53 7200,5787.47 7204.53,5782.94 7204.53,5717.06 7200,5712.53 7200,5687.47 7204.53,5682.94 7204.53,5617.06 7137.47,5550 P2.5
NetP5_2: P5.2 U1.10 | length 369.2
  Bottom Layer w50: U1.10 6450,6350 6425,6375 6425,6454.77 6495.23,6525 P5.2
NetP5_3: P5.3 U1.12 | length 557.8
  Bottom Layer w50: U1.12 6250,6425 6450,6625 P5.3
NetP5_4: P5.4 U2.2 | length 834.6
  Bottom Layer w50: U2.2 5850,7050 6175,6725 P5.4
NetP5_5: P5.5 U2.4 | length 585.9
  Bottom Layer w50: U2.4 6050,7062.53 6287.53,6825 P5.5
NetP7_1: P7.1 U4.2 | length 155
  Bottom Layer w50: P7.1 U4.2
NetP8_2: P8.2 U2.6 | length 938.4
  Bottom Layer w50: U2.6 6250,7162.53 6429.53,7342.06 6429.53,7407.94 6425,7412.47 6425,7625 6275,7775 P8.2
NetP8_3: P8.3 U2.8 | length 572.5
  Bottom Layer w50: P8.3 6175,7700 6350,7525 U2.8
NetP8_4: P8.4 U2.10 | length 531.1
  Bottom Layer w50: P8.4 6075,7712.13 6100,7687.13 6100,7668.93 6150,7618.93 U2.10
NetP8_5: P8.5 U2.12 | length 510.4
  Top Layer w50: v1(5950,7625) 5950,7750 v1(5975,7775)
  Bottom Layer w50: U2.12 v1(5950,7625) ; v1(5975,7775) P8.5
NetP12_1: P12.1 U4.16 | length 180
  Bottom Layer w50: P12.1 U4.16
NetP12_2: P12.2 U4.15 | length 180
  Bottom Layer w50: P12.2 U4.15
NetP14_2: P14.2 U5.2 | length 943.7
  Bottom Layer w50: U5.2 5170.47,8095.47 5170.47,8107.94 5217.06,8154.53 5310.99,8154.53 5393.93,8237.47 5628.01,8237.47 5639.01,8248.46 5639.01,8251.54 5787.47,8400 P14.2
NetP14_3: P14.3 U5.4 | length 755.2
  Bottom Layer w50: U5.4@5350,8087.47 5425,8162.47 5581.07,8162.47 5589.01,8154.53 5682.94,8154.53 5698.46,8139.01 5714.01,8139.01 5714.01,8220.47 5773.06,8279.53 5929.53,8279.53 P14.3
NetP14_4: P14.4 U5.6 | length 864.5
  Bottom Layer w50: U5.6@5550,8087.47 5550,8062.53 5509.84,8022.37 5509.84,7971.23 5497.34,7958.73 5497.34,7896.6 5541.27,7852.66 5603.4,7852.66 5725,7974.26 5725,8037.53 5887.47,8200 P14.4
NetP14_5: P14.5 U5.8 | length 1126
  Bottom Layer w50: U5.8 5800,8525 5845.23,8525 5899.76,8579.53 6101.54,8579.53 6150,8531.07 6150,8287.53 5982.94,8120.47 5970.47,8120.47 P14.5
NetQ1_2: Q1.2 R1.1 | length 175
  Bottom Layer w50: R1.1 Q1.2
NetQ2_2: Q2.2 R2.1 | length 150
  Bottom Layer w50: Q2.2 R2.1
NetQ3_2: Q3.2 R3.1 | length 166.7
  Bottom Layer w50: Q3.2 2568.93,6300 2589.09,6279.84 2609.25,6300 R3.1
NetQ4_2: Q4.2 R4.1 | length 200
  Bottom Layer w50: Q4.2 R4.1
NetQ5_2: Q5.2 R5.1 | length 150
  Bottom Layer w50: Q5.2 R5.1
NetR1_2: R1.2 U4.3 | length 1355.3
  Bottom Layer w50: R1.2 3095.16,8304.84 3095.16,7545.16 3195.47,7444.84 3195.47,7274.76 3245.23,7225 U4.3
NetR2_2: R2.2 U4.6 | length 1017.1
  Bottom Layer w50: R2.2 2975,7550 3120.47,7404.53 3120.47,6929.53 3125,6925 U4.6
NetR3_2: R3.2 U4.17 | length 1117.4
  Bottom Layer w50: R3.2 2725,5950 2725,5737.87 2837.87,5625 2962.13,5625 3162.13,5825 U4.17
NetR4_2: R4.2 U4.18 | length 820.7
  Bottom Layer w50: R4.2 3175,5725 U4.18
NetR5_2: R5.2 U4.19 | length 1928.5
  Bottom Layer w50: R5.2 3075,4450 3075,5400 3300,5625 U4.19
NetU1_1: U1.1 U3.1 | length 1132.1
  Bottom Layer w50: U3.1 5625,5925 U1.1
NetU1_3: U1.3 U3.2 | length 1376.3
  Bottom Layer w25: 5650,6025 5711.61,6025 5728.64,6007.97 6167.03,6007.97 U1.3
  Bottom Layer w50: U3.2 5154.77,6525 5204.53,6475.24 5204.53,6470.47 5650,6025
NetU1_5: U1.5 U3.3 | length 2016.6
  Bottom Layer w50: U3.3 5112.53,6625 5045.47,6557.94 5045.47,6374.76 5649.76,5770.47 6307.94,5770.47 6450,5912.53 U1.5
NetU1_9: U1.9 U3.4 | length 1776.9
  Bottom Layer w50: U3.4 5145.47,6704.53 5157.94,6704.53 5204.53,6657.94 5204.53,6620.47 5754.53,6070.47 6314.41,6070.47 6323.46,6079.53 6417,6079.53 U1.9@6550,6212.53
NetU1_11: U1.11 U3.5 | length 1550.3
  Bottom Layer w50: U3.5 5150,6825 5625,6350 5625,6343.93 5823.46,6145.47 6282.94,6145.47 6350,6212.53 U1.11
NetU1_13: U1.13 U3.6 | length 1326
  Bottom Layer w50: U3.6 5275,6925 5900,6300 6012.53,6300 6017.06,6304.53 6082.94,6304.53 6129.53,6257.94 6129.53,6245.47 U1.13
NetU2_1: U2.1 U3.7 | length 645.7
  Bottom Layer w50: U3.7 5700,7025 U2.1
NetU2_3: U2.3 U3.8 | length 877.5
  Bottom Layer w50: U3.8 5670.23,7125 5699.76,7154.53 5882.94,7154.53 5950,7087.47 U2.3
NetU2_5: U2.5 U3.9 | length 1098.2
  Bottom Layer w50: U3.9 5129.53,7229.53 5964.41,7229.53 5993.93,7200 6037.47,7200 6150,7087.47 U2.5
NetU2_9: U2.9 U3.10 | length 1210.4
  Bottom Layer w25: 5675,7325 5700,7300 6225,7300
  Bottom Layer w50: U3.10 5675,7325 ; 6225,7300 6250,7300 U2.9
NetU2_11: U2.11 U3.11 | length 1364.9
  Bottom Layer w50: U3.11 5493.93,7425 5818.93,7750 5881.07,7750 5931.07,7700 5981.07,7700 6025,7656.07 6025,7637.87 6050,7612.87 U2.11
NetU2_13: U2.13 U3.13 | length 1510.4
  Top Layer w50: v1(4800,7675) v1(5850,7675)
  Bottom Layer w50: v1(4800,7675) 4800,7550 U3.13 ; U2.13 v1(5850,7675)
NetU3_14: U3.14 U5.1 | length 825.5
  Bottom Layer w50: 4775,7818.93 4725,7768.93 4725,7518.93 4745.47,7498.46 4745.47,7492.06 4812.53,7425 U3.14 ; 4793.93,7818.93 U5.1
NetU3_15: U3.15 U5.3 | length 938
  Bottom Layer w25: 4895.47,7375 4895.47,7670.47
  Bottom Layer w50: U3.15 4845.47,7325 4895.47,7375 ; 4895.47,7670.47 5250,8025 U5.3
NetU3_16: U3.16 U5.5 | length 1327.7
  Bottom Layer w50: U3.16 4920.47,7225 4970.47,7275 4970.47,7589.01 5060.99,7679.53 5300,7679.53 5450,7829.53 5422.34,7857.19 5422.34,7989.8 5434.84,8002.3 5434.84,8059.84 U5.5
NetU3_17: U3.17 U5.9 | length 1914.9
  Bottom Layer w25: 5225,8250 5318.08,8250 5368.05,8299.97 5487.5,8299.97 5500,8312.47
  Bottom Layer w50: U3.17 4812.53,7125 4650,7287.53 4650,7825 5075,8250 5225,8250 ; 5500,8312.47 5550,8362.47 U5.9
PD5_G_FAN_SWITCH: P10.2 U4.8 | length 430
  Bottom Layer w50: P10.2 U4.8
PD6_W_HEAT_SWITCH: P10.3 U4.9 | length 430
  Bottom Layer w50: P10.3 U4.9
PD7_Y_COOL_SWITCH: P10.4 U4.10 | length 430
  Bottom Layer w50: P10.4 U4.10
PE0_HVAC_OFF_SWITCH: P10.5 U4.11 | length 430
  Bottom Layer w50: P10.5 U4.11
SPRINKLER_DEMUX_ENABLED: P6.6 U4.25 | length 551.1
  Top Layer w50: v1(4150,6900) v1(4150,7075)
  Bottom Layer w50: U4.25 4055,7050 4112.87,7050 4137.87,7075 v1(4150,7075) ; v1(4150,6900) 4175,6900 4200,6925 P6.6
STEP: P4.5 U4.24 | length 1628.9
  Bottom Layer w50: U4.24 4075,7125 4500,7550 4500,7975 4700,8175 P4.5
TEMPSENSE_ENABLE: P13.4 P15.4 U4.20 | length 3256.7
  Bottom Layer w50: U4.20 3175,5270 3175,4625 3400,4400 3768.93,4400 3943.93,4575 4006.07,4575 4031.07,4550 4650,4550 P15.4
VCC: C4.1 P4.2 P6.2 U1.14 U2.14 U3.24 U4.21 U4.41 U5.14 VR2.2 | length 18645.5
  Top Layer w50: v1(5700,5550) v1(5700,6375) ; v1(5750,7550) v1(6575,7550)
  Bottom Layer w50: VR2.2 C4.1 3775,3625 3900,3500 4831.07,3500 4875,3543.93 4875,3775 5725,4625 5725,5181.07 5775,5231.07 5775,5525 5750,5550 ; U4.41 3550,5605 3550,7000 3975,7425 U4.21 4275,7670 4275,8068.2 4400,8193.2 P4.2 4400,8500 4575,8675 6156.07,8675 6300,8531.07 6300,8100 6579.53,7820.47 6579.53,7279.93 6575,7275.4 6575,6993.53 6679.53,6889.01 6679.53,6870.47 7350,6200 7350,6066.9 7354.53,6062.37 7354.53,5554.93 7195.07,5395.47 6204.05,5395.47 6196.08,5387.5 5787.5,5387.5 5775,5375 ; P6.2 4404.77,6525 4504.77,6425 U3.24 5250,6000 ; U5.14 5050,8675 ; v1(5700,6375) 5850,6225 U1.14 ; U2.14 v1(5750,7550)
  Bottom Layer w100: 5250,6000 v1(5700,5550) 5750,5550
W_TRIGGER: P11.3 U4.12 | length 305
  Bottom Layer w50: P11.3 U4.12
Y_TRIGGER: P11.2 U4.13 | length 305
  Bottom Layer w50: P11.2 U4.13
pads on no net: P1.1 P16.1 P16.2 P16.3 P16.4 P16.5 P17.1 P17.2 P17.3 P17.4 P17.5 P18.1 P18.2 P18.3 P18.4 P18.5 P19.1 P19.2 P19.3 P19.4 P19.5 U4.43 U4.44 U4.45 U4.46 U4.47 U4.48 U4.49 U4.50 U4.51 U4.52 U5.10 U5.11 U5.12 U5.13

## Polygon pours and split planes (outlines as drawn)
GND on Bottom Layer "GndPlane" (solid, pour order 3): 7950,3050 7950,8950 2075,8950 2050,8975 2050,3050
no net on Internal Plane 1 (split plane): 7979.9,3020.1 2020.1,3020.1 2020.1,8979.9 7979.9,8979.9
no net on Internal Plane 2 (split plane): 7979.9,3020.1 2020.1,3020.1 2020.1,8979.9 7979.9,8979.9

## Keep-outs
Keep-Out Layer:
  lines w10: 2050,3050 2050,8975 7950,8975 7950,3050 2050,3050

## Other copper
Bottom Layer:
  text "Created By Levi Balling" at 7050,8875 h200 r90
  text "and Jen Balling" at 7250,8325 h200 r90
  text "Main Controller" at 6450,4850 h100 r90
  text "Version 2" at 6625,4850 h100 r90
  text "Date Made" at 6825,4850 h80 r90
  text "Via count" at 7000,4850 h80 r90
  text "Hole count" at 7175,4850 h80 r90
  text ".Print_Date" at 6825,3975 h80 r90
  text ".Via_Count" at 7000,3975 h80 r90
  text ".Hole_Count" at 7175,3975 h80 r90

## Silkscreen, mask and mechanical layers (free items; w line width, h text height)
Top Overlay:
  lines w50: 3400,7650 3400,8950 ; 4000,7625 4000,8925
  text "com connector" at 3700,8025 h60 r90
Drill Drawing:
  text ".LEGEND" at 8200,3200 h60
  text "Drill Drawing." at 8200,3100 h60

## Dimensions
2050,3050 to 2050,8975 on Mechanical 1
2050,3050 to 7950,3050 on Mechanical 1

## Text inside footprints (layer, text, board x,y; h text height)
J1: Top Overlay "6" at 2466.73,8879.13 h59.06; Top Overlay "9" at 2793.9,8879.13 h59.06; Top Overlay "5" at 2848.43,8509.06 h59.06; Top Overlay "1" at 2422.05,8509.06 h59.06
J2: Top Overlay "6" at 2120.87,7291.73 h59.06 r90; Top Overlay "9" at 2120.87,7618.9 h59.06 r90; Top Overlay "5" at 2490.94,7673.43 h59.06 r90; Top Overlay "1" at 2490.94,7247.05 h59.06 r90
J3: Top Overlay "6" at 2120.87,6016.73 h59.06 r90; Top Overlay "9" at 2120.87,6343.9 h59.06 r90; Top Overlay "5" at 2490.94,6398.43 h59.06 r90; Top Overlay "1" at 2490.94,5972.05 h59.06 r90
J4: Top Overlay "6" at 2120.87,4741.73 h59.06 r90; Top Overlay "9" at 2120.87,5068.9 h59.06 r90; Top Overlay "5" at 2490.94,5123.43 h59.06 r90; Top Overlay "1" at 2490.94,4697.05 h59.06 r90
J5: Top Overlay "6" at 2120.87,3466.73 h59.06 r90; Top Overlay "9" at 2120.87,3793.9 h59.06 r90; Top Overlay "5" at 2490.94,3848.43 h59.06 r90; Top Overlay "1" at 2490.94,3422.05 h59.06 r90
VR1: Top Overlay "1" at 4315.16,3455.32 h59.06; Top Overlay "2" at 4505.32,3455.32 h59.06; Top Overlay "3" at 4405.31,3455.32 h59.06
VR2: Top Overlay "1" at 3290.16,3480.32 h59.06; Top Overlay "2" at 3480.32,3480.32 h59.06; Top Overlay "3" at 3380.32,3480.32 h59.06